# Altium PCB PCB.PcbDoc
Units mm, origin at the board's own origin, x right, y up, seen from the top; angles counter-clockwise.
Board outline 150.33 x 100.29 mm, 2 copper layers (Top Layer, Bottom Layer); 62 components, 51 nets, 221 pads, 24 vias.
Unrouted connection lines stored in the file: 2.
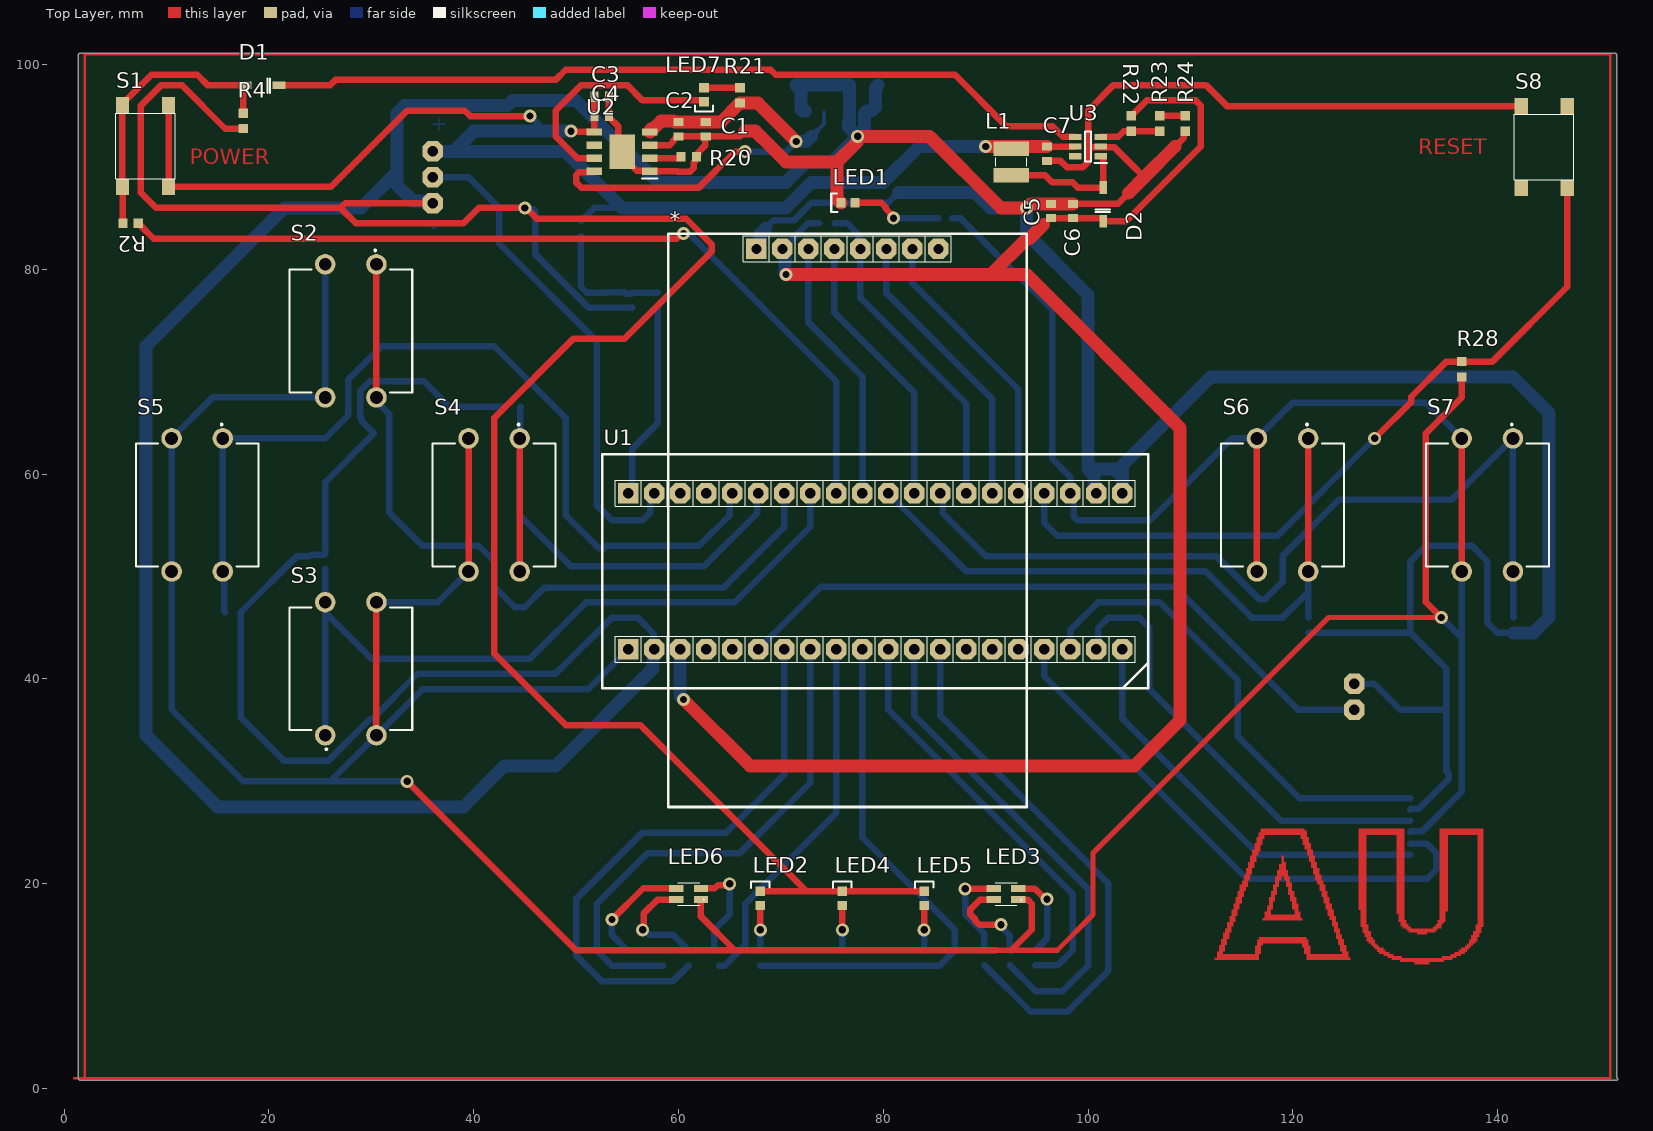
[diagram p0: Top Layer view]
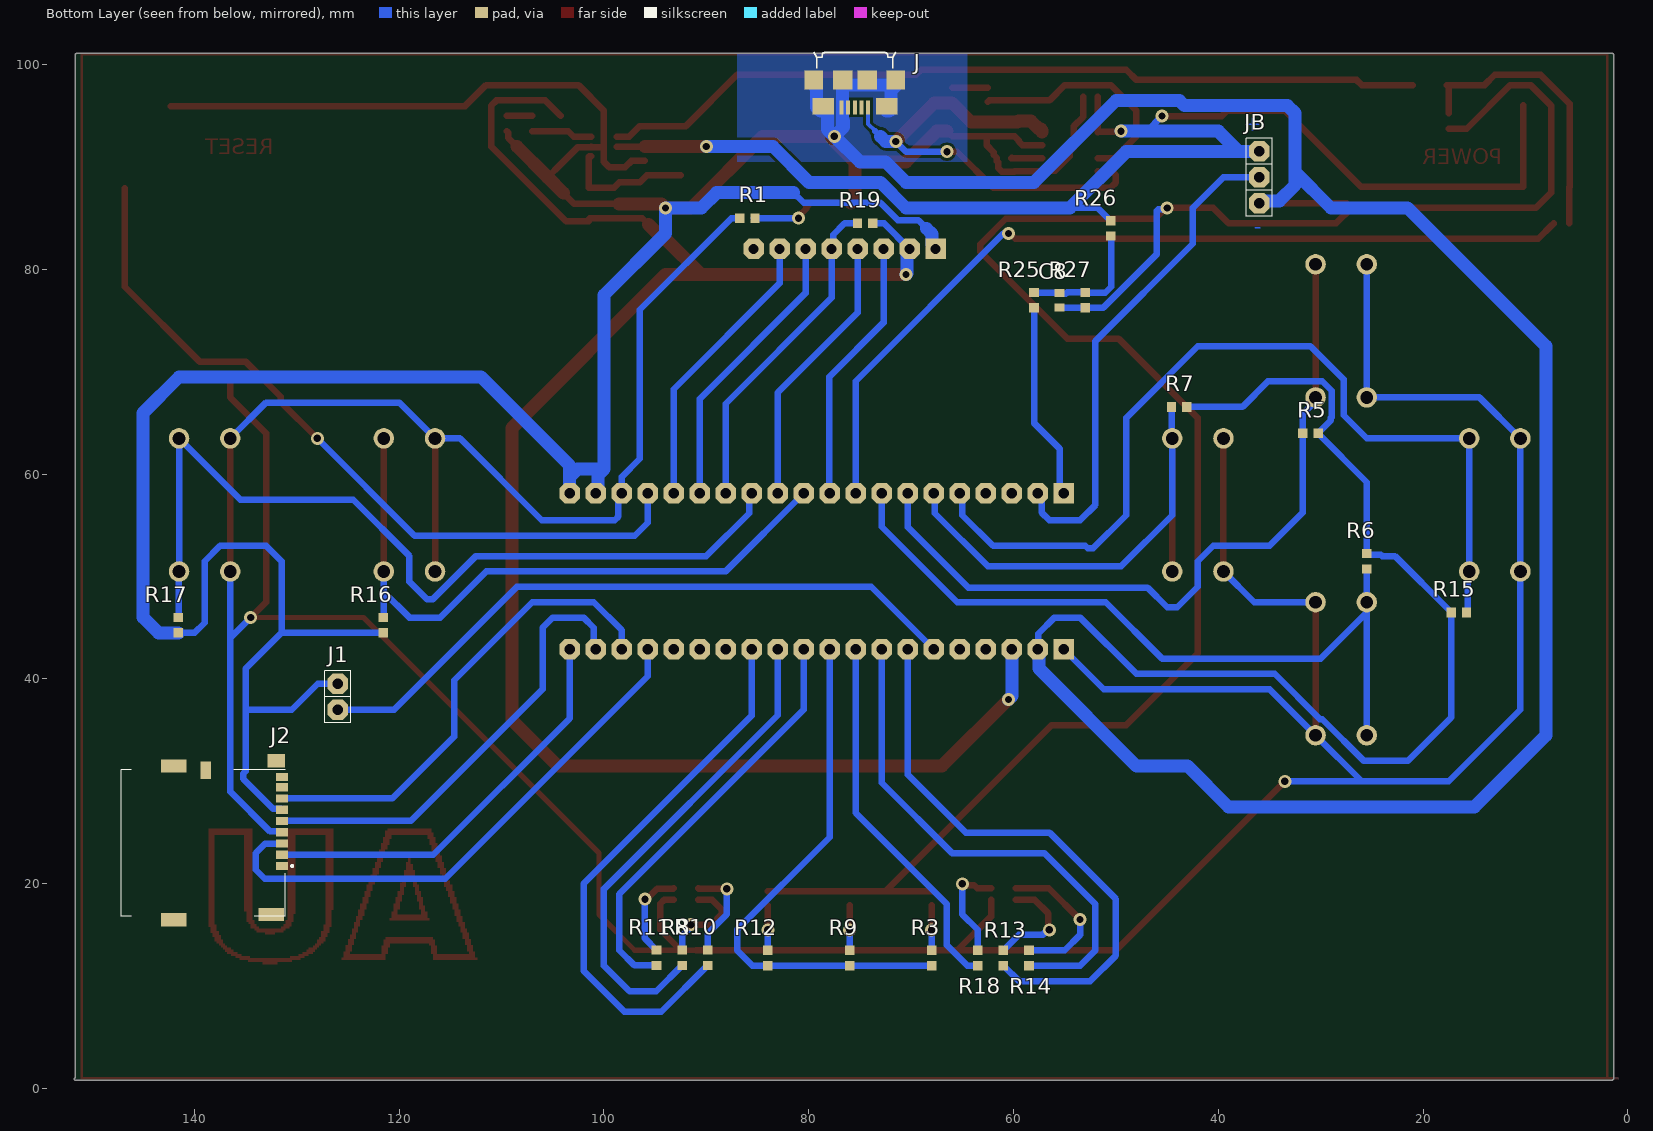
[diagram p1: Bottom Layer view, seen from below]
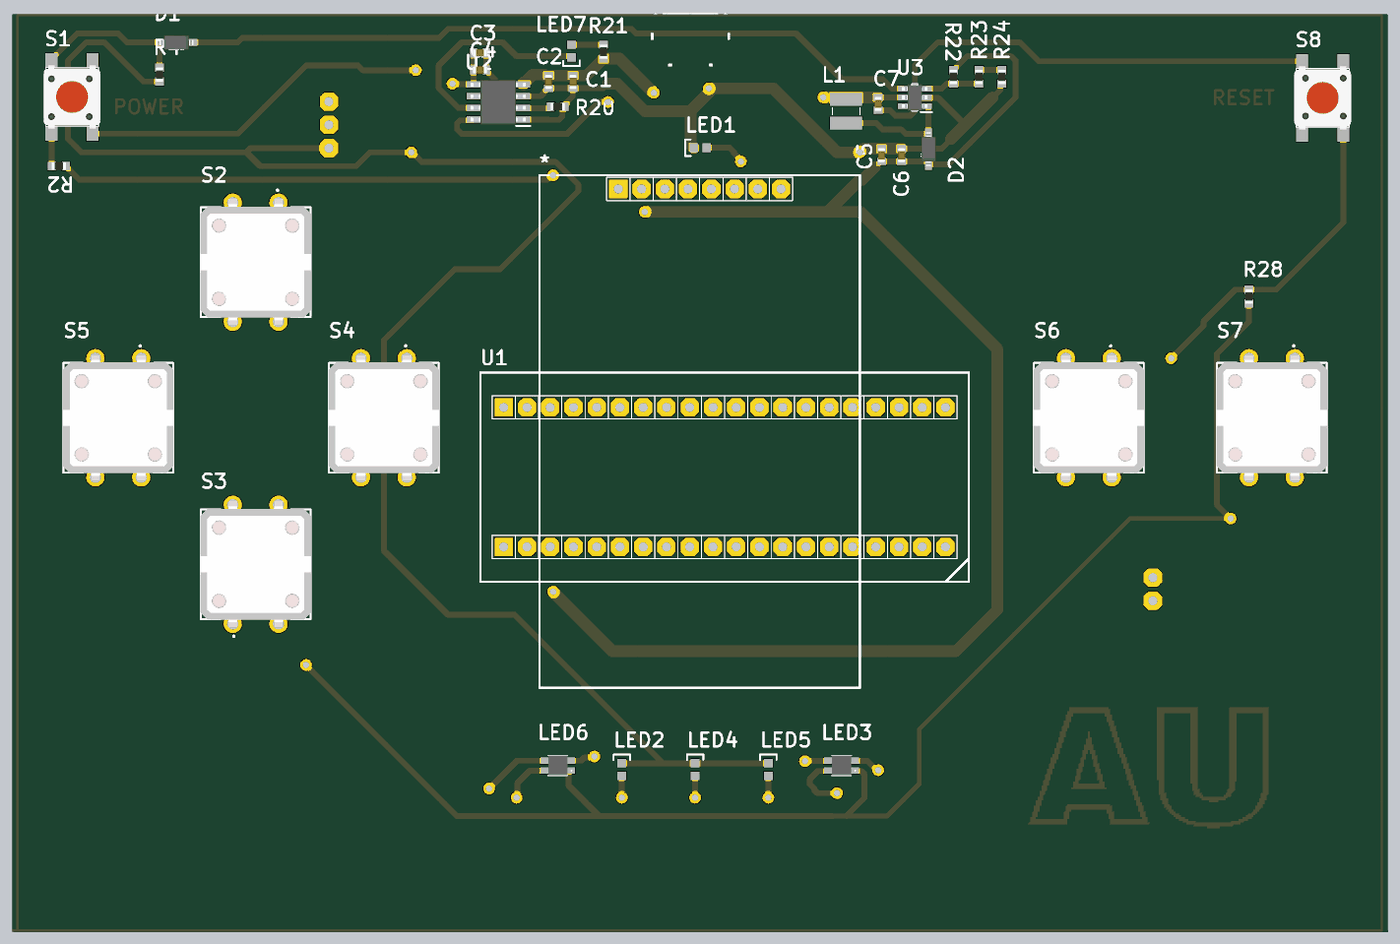
[diagram p2: 3D render of the assembled board from above, using the file's embedded part models]
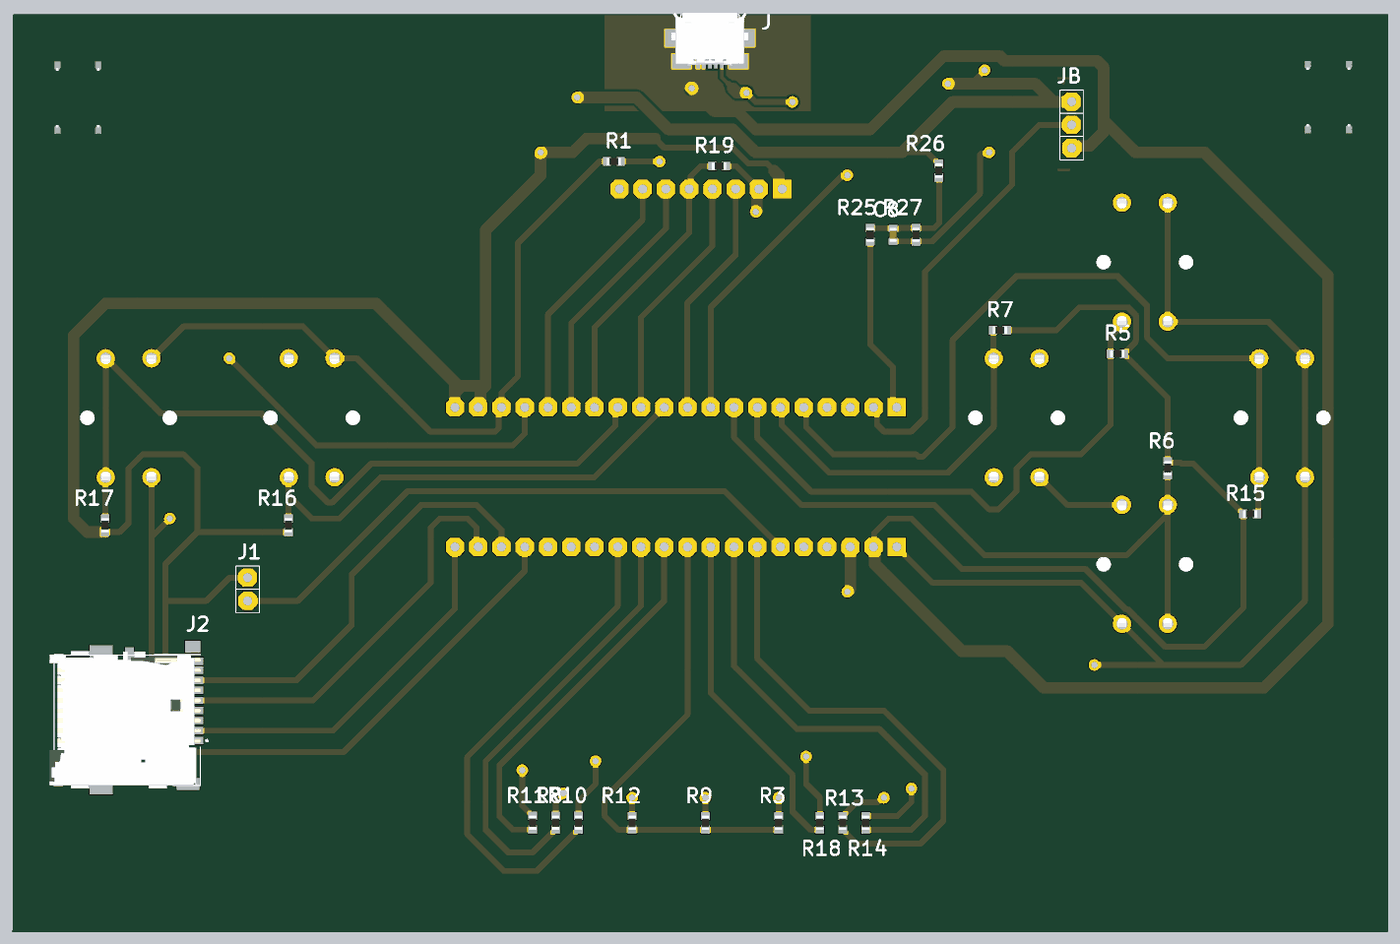
[diagram p3: 3D render of the assembled board from below, using the file's embedded part models]

## Layer stack, top to bottom
Top Solder: solder mask 0.0102, Solder Resist, Dk 3.5
Top Layer: signal copper 0.0356
Dielectric 1: dielectric 0.32, FR-4, Dk 4.8
Bottom Layer: signal copper 0.0356
Bottom Solder: solder mask 0.0102, Solder Resist, Dk 3.5

## Board outline
1.397,0.965 ccw(c1.524,0.965) 1.508,0.839 ccw(c1.599,0.928) 1.599,0.801 151.599,0.801 ccw(c151.599,0.928) 151.726,0.928 ccw(c151.599,0.928) 151.651,1.044 151.651,100.965 ccw(c151.524,100.965) 151.524,101.092 1.524,101.092 ccw(c1.524,100.965) 1.397,100.965

## Design rules (kind name [scope] priority, off if disabled: settings)
Clearance [All] p1: gap=0.254 ignorepadtopadclearanceinfootprint=FALSE except(0: Arc-Hole Track-Hole SMDPad-Hole THPad-Hole Via-Hole Fill-Hole Poly-Hole Region-Hole Text-Hole)
PolygonConnect [All] p1: connectstyle=Relief reliefconductorwidth=0.254 reliefentries=4 polygonreliefangle="90 Angle" airgapwidth=0.254
RoutingVias [All] p1: holewidth=0.711 width=1.27 viastyle="Through Hole" minholewidth=0.711 minwidth=1.27 maxholewidth=0.711 maxwidth=1.27
SolderMaskExpansion [All] p1: expansion=0.102 istentingtop=FALSE
Width [All] p1: maxlimit=2.54 minlimit=0.406 preferedwidth=0.508
30 further rules are at their usual default settings.

## Components (designator, comment, footprint, x,y, rotation, side; value= is the part's Value field where it differs from the comment)
* "1.8_ST7735_TFT" 1.8_ST7735_TFT 77.5,55 r0 top
C1 "4.7uF" "0603 Capacitor" 62.671,93.7 r270 top
C2 "4.7uF" "0603 Capacitor" 60,93.7 r270 top
C3 "4.7uF" "0603 Capacitor" 52.5,96.865 r180 top
C4 "4.7uF" "0603 Capacitor" 52.5,95 r180 top
C5 "4.7uF" "0603 Capacitor" 96.374,85.7 r270 top
C6 "4.7uF" "0603 Capacitor" 98.55,85.7 r270 top
C7 "4.7uF" "0603 Capacitor" 96,91.3 r90 top
C8 "4.7uF" "0603 Capacitor" 55.5,77 r90 bottom
D1 "SOD-123 Diode" SOD123 19.35,98 r180 top
D2 "SOD-123 Diode" SOD123 101.5,86.35 r90 top
J "MicroUSB" MicroUSB 75.5,98.5 r0 bottom
J1 "JumperHDR_ALT" JumperHDR 126,37 r90 bottom
J2 "TF_SD" TF_SD 139,24 r90 bottom
JB "JumperHDR3" JumperHDR3 36,91.54 r270 bottom
L1 "INDUCTOR_3x3.5" INDUCTOR_3x3.5 92.5,90.5 r90 top
LED1 "0603 LED" "0603 LED" 76.5,86.5 r0 top
LED2 "0603 LED" "0603 LED" 68,18.635 r270 top
LED3 "2020 RGB LED" "20x20 RGB LED" 92,19 r0 top
LED4 "0603 LED" "0603 LED" 76,18.635 r270 top
LED5 "0603 LED" "0603 LED" 84,18.635 r270 top
LED6 "2020 RGB LED" "20x20 RGB LED" 61,19 r0 top
LED7 "0603 LED" "0603 LED" 62.5,97 r90 top
R1 "4.7K" "0603 Resistor" 86,85 r0 bottom
R2 "4.7K" "0603 Resistor" 6.5,84.5 r180 top
R3 "4.7K" "0603 Resistor" 68,12.75 r270 bottom
R4 "4.7K" "0603 Resistor" 17.5,94.5 r90 top
R5 "4.7K" "0603 Resistor" 31,64 r0 bottom
R6 "4.7K" "0603 Resistor" 25.5,51.5 r270 bottom
R7 "4.7K" "0603 Resistor" 43.831,66.572 r0 bottom
R8 "4.7K" "0603 Resistor" 92.362,12.768 r90 bottom
R9 "4.7K" "0603 Resistor" 76,12.75 r270 bottom
R10 "4.7K" "0603 Resistor" 89.862,12.768 r90 bottom
R11 "4.7K" "0603 Resistor" 94.862,12.768 r90 bottom
R12 "4.7K" "0603 Resistor" 84,12.75 r270 bottom
R13 "4.7K" "0603 Resistor" 61,12.75 r90 bottom
R14 "4.7K" "0603 Resistor" 58.5,12.75 r90 bottom
R15 "4.7K" "0603 Resistor" 16.5,46.5 r180 bottom
R16 "4.7K" "0603 Resistor" 121.545,45.261 r90 bottom
R17 "4.7K" "0603 Resistor" 141.568,45.261 r90 bottom
R18 "4.7K" "0603 Resistor" 63.5,12.75 r90 bottom
R19 "10K" "0603 Resistor" 74.5,84.5 r180 bottom
R20 "1.2K" "0603 Resistor" 61,91 r180 top
R21 "1K" "0603 Resistor" 66,97 r90 top
R22 "4,7k" "0603 Resistor" 104.213,94.25 r90 top
R23 "470R" "0603 Resistor" 107,94.25 r270 top
R24 "200R" "0603 Resistor" 109.5,94.25 r90 top
R25 "1K" "0603 Resistor" 58,77 r270 bottom
R26 "1M" "0603 Resistor" 50.5,84 r90 bottom
R27 "1M" "0603 Resistor" 53,77 r90 bottom
R28 "4.7K" "0603 Resistor" 136.5,70.25 r90 top
S1 "GUC" "TACT SWITCH SMD" 8,92 r90 top
S2 "YUKARI" "12x12 Tact Switch" 28,74 r90 top
S3 "ASAGI" "12x12 Tact Switch" 28,41 r270 top
S4 "SAG" "12x12 Tact Switch" 42,57 r90 top
S5 "SOL" "12x12 Tact Switch" 13,57 r90 top
S6 "A" "12x12 Tact Switch" 119,57 r90 top
S7 "B" "12x12 Tact Switch" 139,57 r90 top
S8 "RESET" "TACT SWITCH SMD" 144.5,92 r270 top
U1 "STM32F103_BLUE" STM32_BLUE_PILL 81,49.5 r180 top
U2 "TP4056" TP4056A 54.5,91.5 r180 top
U3 "MT3608" MT3608 100,92 r180 top

## Footprints (in the part's own frame and the unit in brackets; to place one, negate y for a bottom-side part, rotate by r counter-clockwise, add the part's x,y. Pads: shape width x height; smd on the part's side, far side on the other; paste and mask are expansions set on the pad)
1.8_ST7735_TFT [mm]
  rect 2x2 hole 1: 1(-9.89,27)
  oct 2x2 hole 1: 2(-7.35,27) 3(-4.81,27) 4(-2.27,27) 5(0.27,27) 6(2.81,27) 7(5.35,27) 8(7.89,27)
  silkscreen extent -18.5,-27.5 16.5,28.5
"12x12 Tact Switch" [mm]
  round 2 hole 1.25: 1(-6.5,-2.5) 1(6.5,-2.5) 2(-6.5,2.5) 2(6.5,2.5)
  silkscreen extent -6,-6 7.94,6, body extent -6.9,-6.05 6.9,6.05, height 7.3
"20x20 RGB LED" [mm]
  rect 1.4x0.7 smd: 1(1.2,-0.55) 2(-1.2,-0.55) 3(-1.2,0.55) 4(1.2,0.55)
  silkscreen extent -1.08,-1.08 1.54,1.08, body extent -1.05,-1.05 1.05,1.05, height 1.2
"0603 Capacitor" [mm]
  rect 0.78x0.99 smd: 1(-0.7,0) 2(0.7,0)
  body extent -0.8,-0.41 0.8,0.41, height 0.9
"0603 LED" [mm]
  rect 0.9x0.95 smd: 1(-0.635,0) 2(0.75,0)
  silkscreen extent -1.58,-0.9 -0.97,0.9
"0603 Resistor" [mm]
  rect 0.9x0.95 smd: 1(-0.75,0) 2(0.75,0)
  body extent -0.77,-0.4 0.77,0.4, height 0.55
INDUCTOR_3x3.5 [mm]
  rect 1.4x3.5 smd: 1(-1.3,0) 2(1.3,0)
  silkscreen extent -0.4,-1.5 0.4,1.5
JumperHDR [mm]
  oct 2x2 hole 1: 1(0,0) 2(2.54,0)
  silkscreen extent -1.27,-1.27 3.81,1.27
JumperHDR3 [mm]
  oct 2x2 hole 1: 1(0,0) 2(2.54,0) 3(5.08,0)
  silkscreen extent -1.27,-1.27 6.35,1.27
MicroUSB [mm]
  rect 0.4x1.35 smd: 1(-1.3,2.675) 2(-0.65,2.675) 3(0,2.675) 4(0.65,2.675) 5(1.3,2.675)
  rect 1.8x1.9 smd: 5(-4,0) 5(4,0)
  rect 2.1x1.6 smd: 5(-3.1,2.55) 5(3.1,2.55)
  rect 1.9x1.9 smd: 5(-1.2,0) 5(1.2,0)
  silkscreen extent -4,-2.7 4,-1.13, body extent -4.32,-2.8 4.33,3.1, height 2.76
MT3608 [mm]
  rect 1.2x0.6 smd: 1(-1.25,0.95) 2(-1.25,0) 3(-1.25,-0.95) 4(1.25,-0.95) 5(1.25,0) 6(1.25,0.95)
  silkscreen extent -1.85,-1.45 0.3,1.6, body extent -1.4,-1.45 1.4,1.45, height 1.45
SOD123 [mm]
  rect 1.25x0.75 smd: 1(-1.65,0) 2(1.65,0)
  silkscreen extent -0.76,-0.64 -0.51,0.76, body extent -1.85,-0.77 1.85,0.77, height 1.35
STM32_BLUE_PILL [mm]
  oct 2x2 hole 1: 1(-22.352,6.604) 2(-19.812,6.604) 3(-17.272,6.604) 4(-14.732,6.604) 5(-12.192,6.604) 6(-9.652,6.604) 7(-7.112,6.604) 8(-4.572,6.604) 9(-2.032,6.604) 10(0.508,6.604) 11(3.048,6.604) 12(5.588,6.604) 13(8.128,6.604) 14(10.668,6.604) 15(13.208,6.604) 16(15.748,6.604) 17(18.288,6.604) 18(20.828,6.604) 19(23.368,6.604) 21(-22.352,-8.636) 22(-19.812,-8.636) 23(-17.272,-8.636) 24(-14.732,-8.636) 25(-12.192,-8.636) 26(-9.652,-8.636) 27(-7.112,-8.636) 28(-4.572,-8.636) 29(-2.032,-8.636) 30(0.508,-8.636) 31(3.048,-8.636) 32(5.588,-8.636) 33(8.128,-8.636) 34(10.668,-8.636) 35(13.208,-8.636) 36(15.748,-8.636) 37(18.288,-8.636) 38(20.828,-8.636) 39(23.368,-8.636)
  rect 2x2 hole 1: 20(25.908,6.604) 40(25.908,-8.636)
  silkscreen extent -24.89,-12.45 28.45,10.41
"TACT SWITCH SMD" [mm]
  rect 1.55x1.3 smd: 1(-3.95,2.3) 1(4.05,2.3) 2(-3.95,-2.2) 2(4.05,-2.2)
  silkscreen extent -3.15,-2.85 3.25,2.95, body extent -3.9,-3.05 4,3.15, height 7
TF_SD [mm]
  rect 0.8x1.2 smd: 1(-2.27,-7.55) 2(-1.17,-7.55) 3(-0.07,-7.55) 4(1.03,-7.55) 5(2.13,-7.55) 6(3.23,-7.55) 7(4.33,-7.55) 8(5.43,-7.55) 9(6.43,-7.55)
  rect 1.3x2.5 smd: 10(-7,-6.5) 11(-7.5,3) 12(7.5,3)
  rect 1.3x1.7 smd: 13(8,-7)
  rect 1.7x1 smd: CD1(7.08,-0.1)
  silkscreen extent -7.15,-8.65 7.15,8.15, body extent -7.5,-7.88 7.5,8.62, height 1.65
TP4056A [mm]
  rect 1.525x0.7 smd: 1(-2.712,1.905) 2(-2.712,0.635) 3(-2.712,-0.635) 4(-2.712,-1.905) 5(2.712,-1.905) 6(2.712,-0.635) 7(2.712,0.635) 8(2.712,1.905)
  rect 2.513x3.402 smd: 3(0,0)
  silkscreen extent -3.47,2.6 -1.95,2.6, body extent -3,-2.45 3,2.45, height 1.75

## Part data
C1 C2 C3 C4 C5 C6 C7 C8: library part "0603 Capacitor", "Capacitor", Arrow Part Number=06031A120JAT2A, Manufacturer_Name=AVX, Mouser Part Number=581-06031A120J, Arrow Price/Stock=https://www.arrow.com/en/products/06031a120jat2a/avx, Datasheet Link=http://www.mouser.com/catalog/supplier/library/pdf/AVXSurfaceMountCeramic.pdf, Height=0.9mm, Manufacturer_Part_Number=06031A120JAT2A, Mouser Price/Stock=https://www.mouser.co.uk/ProductDetail/AVX/06031A120JAT2A?qs=tMrmimOZp5UsY%252BxF6dNGxQ%3D%3D
D1 D2: "Diode", Arrow Part Number=1N4148W-G3-08, Manufacturer_Name=Vishay, Mouser Part Number=78-1N4148W-G3-08, Arrow Price/Stock=https://www.arrow.com/en/products/1n4148w-g3-08/vishay, Datasheet Link=https://componentsearchengine.com/Datasheets/1/1N4148W-G3-08.pdf, Height=1.35mm, Manufacturer_Part_Number=1N4148W-G3-08, Mouser Price/Stock=https://www.mouser.co.uk/ProductDetail/Vishay-Semiconductors/1N4148W-G3-08?qs=uS%252BVSIFnvp46StDBB15x4Q%3D%3D
J: Package=None, Availability=Unavailable, MF=Hirose, MP=ZX62-B-5PA, Price=None, SnapEDA_Link=https://www.snapeda.com/parts/ZX62-B-5PA/Hirose%20Electric%20Co%20Ltd/view-part/134668/?ref=snap
J2: "Connector", Arrow Part Number=045138008100858+, Manufacturer_Name=AVX, Mouser Part Number=581-045138008100858+, Arrow Price/Stock=https://www.arrow.com/en/products/045138008100858/avx, Datasheet Link=https://www.mouser.sg/datasheet/2/909/5138-1359342.pdf, Height=1.4mm, Manufacturer_Part_Number=045138008100858+, Mouser Price/Stock=https://www.mouser.com/Search/Refine.aspx?Keyword=581-045138008100858%2B
L1: "Inductor", Manufacturer_Name="Shuo Xing", Manufacturer_Part_Number=CD32-4R7M, Datasheet Link=http://aitendo3.sakura.ne.jp/aitendo_data/product_img/parts/coil/CD32/CD32.pdf, Height=2.4mm
LED1 LED2 LED4 LED5 LED7: "LED", Manufacturer_Name="Wurth Elektronik", Manufacturer_Part_Number=150060GS55040, Mouser Part Number=710-150060GS55040, Datasheet Link=https://katalog.we-online.de/led/datasheet/150060GS55040.pdf, Height=0.5mm, Mouser Price/Stock=https://www.mouser.com/Search/Refine.aspx?Keyword=710-150060GS55040
LED3 LED6: "LED", Manufacturer_Name="Foshan NationStar Optoelectronics", Manufacturer_Part_Number=FM-B2020RGBA-HG, Datasheet Link=https://datasheet.lcsc.com/szlcsc/Foshan-NationStar-Optoelectronics-FM-B2020RGBA-HG_C108793.pdf, Height=1.1mm
R1 R2 R3 R4 R5 R6 R7 R8 R9 R10 R11 R12 R13 R14 R15 R16 R17 R18 R19 R20 R21 R22 R23 R24 R25 R26 R27 R28: library part "0603 Resistor", "Resistor", Arrow Part Number=CPF0603B100RE1, Manufacturer_Name="TE Connectivity", Mouser Part Number=279-CPF0603B100RE1, Arrow Price/Stock=https://www.arrow.com/en/products/cpf0603b100re1/te-connectivity, Datasheet Link=http://www.farnell.com/datasheets/1786775.pdf, Height=0.55mm, Manufacturer_Part_Number=CPF0603B100RE1, Mouser Price/Stock=https://www.mouser.co.uk/ProductDetail/TE-Connectivity-Neohm/CPF0603B100RE1?qs=DfH2yQaBz6s2KWheq2AlNw%3D%3D
S1 S8: library part "TACT SWITCH SMD", Package=None, Availability=Unavailable, MF=Omron, MP=B3F-1000, Price=None, SnapEDA_Link=https://www.snapeda.com/parts/B3F-1000/Omron%20Electronics%20Inc-EMC%20Div/view-part/48569/?ref=snap
S2 S3 S4 S5 S6 S7: library part TACTSWITCH_12x12, "Switch", Arrow Part Number=B3F-4005, Manufacturer_Name="Omron Electronics", Mouser Part Number=653-B3F-4005, Arrow Price/Stock=https://www.arrow.com/en/products/b3f4005/omron?region=nac, Datasheet Link=http://omronfs.omron.com/en_US/ecb/products/pdf/en-b3f.pdf, Manufacturer_Part_Number=B3F-4005, Mouser Price/Stock=https://www.mouser.co.uk/ProductDetail/Omron-Electronics/B3F-4005?qs=B3tblJ0Nlt%2F4UotbOU6yJQ%3D%3D
U2: "Connector", Manufacturer_Name="NanJing Top Power", Datasheet Link=https://dlnmh9ip6v2uc.cloudfront.net/datasheets/Prototyping/TP4056.pdf, Height=1.75mm, Manufacturer_Part_Number=TP4056
U3: "Undefined or Miscellaneous", Manufacturer_Name=Aerosemi, Datasheet Link=https://www.olimex.com/Products/Breadboarding/BB-PWR-3608/resources/MT3608.pdf, Height=1.45mm, Manufacturer_Part_Number=MT3608

## Via types
v1: diameter 1.27, hole 0.711, Top Layer to Bottom Layer, 24 vias

## Nets (pads, with @x,y where several pads share a name; then routed paths per layer and width w, separated by ;. In a path a pad name is that pad's centre, name@x,y a point inside that pad or via, vN(x,y) a via of type N, cw(c..) or ccw(c..) an arc to the next point about the centre after c; other vN are vias at no path point)
3V3: J2.4 LED3.1 LED6.1 R1.2 R28.1 S2.2 S3.2 S4.2 S5.2 S6.2 S7.2 U1.20 U1.23 | length 452.1
  Top Layer w0.508: 91,13.5 92.5,13.5 97,13.5 100.5,17 100.5,23 123.5,46 v1(134.5,46)
  Top Layer w0.635: S3.2@30.5,34.5 S3.2@30.5,47.5 ; v1(33.5,30) 50,13.5 65.5,13.5 ; S4.2@39.5,50.5 S4.2@39.5,63.5 ; LED6.1 62.2,16.8 65.5,13.5 ; 91,13.5 88.5,13.5 65.5,13.5 ; 92.5,13.5 94.5,15.5 94.5,18.046 94.128,18.417 93.233,18.417 LED3.1 ; S6.2@116.5,50.5 S6.2@116.5,63.5 ; v1(134.5,46) 133,47.5 133,64 136.5,67.5 R28.1 ; S7.2@136.5,50.5 S7.2@136.5,63.5
  Bottom Layer w0.635: S2.2@25.5,80.5 25.5,67.5 14.5,67.5 10.5,63.5 10.5,50.5 10.5,37 17.5,30 26,30 ; S3.2@30.5,47.5 36.5,47.5 S4.2@39.5,50.5 ; v1(33.5,30) 26,30 ; U1.20 51.196,39 35,39 30.5,34.5 26,30 ; R1.2 87.552,85 96.5,76.052 96.5,61.5 98.272,59.728 U1.23 98.585,57.823 98.585,55.872 98.957,55.5 106.07,55.5 114.07,63.5 116.5,63.5 120,67 133,67 S7.2@136.5,63.5 ; J2.4 131.533,25.113 132.613,25.113 136.5,29 136.5,44 ; v1(134.5,46) 136.5,44 ; S7.2@136.5,50.5 136.5,44
5V: *.2 C5.2 C6.2 D2.1 R19.2 R22.2 U1.18 | length 176.2
  Top Layer w0.635: 95.635,84.365 96.269,85 C5.2 C6.2 101.379,85 101.5,84.879 D2.1 103.7,84.7 111,92 111,96 110.5,96.5 105.738,96.5 104.238,95 R22.2
  Top Layer w1.27: v1(60.5,38) 67,31.5 104.5,31.5 109,36 109,64.5 94,79.5 90.5,79.5 ; v1(70.5,79.5) 90.5,79.5 ; 95.635,84.365 94.269,83 94,83 90.5,79.5
  Bottom Layer w0.635: *.2 72.65,84.5 R19.2
  Bottom Layer w1.27: U1.18 60.172,38.328 v1(60.5,38) ; *.2 70.387,81.763 70.387,79.613 v1(70.5,79.5)
5VUSB: C1.1 C2.1 J.1 R21.1 U2.4 U2.8 | length 47.9
  Top Layer w0.635: U2.8 51.693,89.5 50.298,89.5 50,89.202 50,88.5 50.5,88 62,88 65.5,91.5 v1(66.5,91.5)
  Top Layer w1.27: U2.4 57.212,93.562 57.34,93.69 57.497,93.69 58.307,94.5 59.5,94.5 59.6,94.4 C2.1 C1.1 64.15,94.4 R21.1 67.75,96.25 v1(71.5,92.5)
  Bottom Layer w0.406: 73.5,93.5 74.2,94.2 J.1@74.2,95.325
  Bottom Layer w0.635: v1(66.5,91.5) 70.5,91.5 v1(71.5,92.5) ; 73,93 73.5,93.5
  Bottom Layer w1.27: v1(71.5,92.5) 72.5,92.5 73,93
GND: *.1 C1.2 C2.2 C3.1 C4.1 C5.1 C6.1 C7.1 C8.1 J1.2 J2.6 J.4 J.5 JB.3 LED1.1 LED2.1 LED4.1 LED5.1 R4.1 R5.1 R6.1 R7.1 R15.1 R16.1 R17.1 R20.1 R24.1 R27.1 S8.2 U1.19 U1.21 U1.22 U2.1 U2.3 U3.2 | length 878.1
  Top Layer w0.635: R4.1 15.75,93.75 11.5,98 9.5,98 7.5,96 7.5,87.5 9,86 27,86 ; JB.3 27.46,86.46 27,86 ; C3.1 C4.1 53.2,94.895 54.095,94 54.128,94 54.128,91.872 54.5,91.5 54.5,91.055 55.928,89.627 57.18,89.627 U2.1 59.905,89.595 59.951,89.549 61.137,89.549 61.509,89.921 61.509,90.471 61.618,90.579 61.618,90.867 R20.1 61.946,91.196 61.946,91.455 62.636,92.146 62.636,92.965 C1.2 ; U2.3@57.212,92.135 59.135,92.135 59.496,92.496 59.496,92.601 59.895,93 C2.2 C1.2 ; 66.5,93.5 66,93 C1.2 ; LED2.1 72.5,19.27 ; LED5.1 LED4.1 72.5,19.27 ; C7.1 97.32,90.6 97.921,90 99.5,90 100,90.5 100,91.702 ; C6.1 102.9,86.4 103.95,87.45 ; 105.5,89 104.205,90.295 102.546,91.954 101.296,91.954 U3.2 101.204,91.954 100.252,91.954 100,91.702 ; 108.5,92 109.343,92.843 109.343,93.367 109.475,93.5 R24.1 ; S8.2@142.3,95.95 113.566,95.95 111.516,98 102.5,98 100,95.5 100,91.702 ; 27,86 28.5,84.5 39,84.5 40.5,86 v1(45,86) 45.123,86 46.184,84.939 60.767,84.939 63.237,82.469 63.237,81.737 54.75,73.25 49.75,73.25 42,65.5 42,42.5 49,35.5 56.27,35.5 72.5,19.27
  Top Layer w1.27: 66.5,93.5 67.5,93.5 69,92 70.5,90.5 75.5,90.5 ; LED1.1 75.5,86.865 75.5,90.5 ; C6.1 C5.1 94.4,86.4 v1(94,86) 91.5,86 84.5,93 v1(77.5,93) 77.5,92.5 75.5,90.5 ; 103.95,87.45 105.5,89 108.5,92
  Bottom Layer w0.635: R7.1 37.649,66.572 35.149,69.071 29.849,69.071 28.929,68.151 28.929,65.571 29,65.5 29,65.275 30.25,64.025 R5.1 30.25,63.975 25.5,59.225 R6.1 25.368,52.117 24.117,52.117 24,52 22.75,52 17.408,46.657 17.383,46.657 17.25,46.525 R15.1 17.25,36.25 21.5,32 25.778,32 29.849,36.072 30.072,36.072 34.5,40.5 48,40.5 53.5,46 56,46 57.579,44.421 57.579,42.948 U1.19 ; v1(45,86) 45.121,85.878 45.852,85.878 46,85.73 46,81.5 51.225,76.275 55.475,76.275 C8.1 ; 68.5,84 69.294,84.794 71.294,84.794 73,86.5 80.5,86.5 81.5,87.5 ; R16.1 131.489,44.511 ; J1.2 127.96,39.54 130.5,37 135,37 ; J2.6 131.533,27.313 132.313,27.313 135.237,30.237 135.237,30.763 135,31 135,37 ; R17.1 139.989,44.511 139,45.5 139,51.5 137.5,53 133,53 131.489,51.489 131.489,44.511 ; 131.489,44.511 135,41 135,37
  Bottom Layer w1.27: JB.3 35.763,86.697 34.047,86.697 32.5,88.244 32.5,89.5 ; U1.19 57.5,42.764 57.5,41 48,31.5 43,31.5 39,27.5 15,27.5 8,34.5 8,72.5 21.5,86 29,86 32.5,89.5 ; *.1 67.975,82.365 67.975,83.475 68.5,84 ; J.5@72.4,95.45 72.15,95.45 71.985,95.615 71.985,97.465 71.5,97.95 71.5,98 74.3,98 76.7,98 76.7,94.022 76.589,93.911 ; 76.589,94.5 76.589,93.911 ; J.5@79.5,98 79.235,97.735 79.235,95.835 78.85,95.45 78.6,95.45 78.35,95.45 78.185,95.285 78.185,93.685 v1(77.5,93) ; 81.5,87.5 89,87.5 90.5,86 v1(94,86) 94,83.5 100,77.5 100,60.5 ; U1.22 100.575,58.373 100.575,59.925 100,60.5 ; 103.115,59.993 102.608,60.5 100,60.5 ; U1.21 103.352,60.852 112,69.5 141.5,69.5 145,66 145,46 143.511,44.511 R17.1 ; 32.5,89.5 32.5,95.256 33.244,96 43.304,96 43.804,96.5 50,96.5 58,88.5 70.5,88.5 72.5,90.5 75,90.5 v1(77.5,93) ; 76.589,93.911 v1(77.5,93)
NetC8_2: C8.2 R25.1 R26.1 R27.2 | length 12.9
  Bottom Layer w0.635: R26.1 50.46,83.21 50.46,78.297 51.032,77.725 52.975,77.725 R27.2 54.75,77.75 54.887,77.613 54.901,77.628 55.427,77.628 C8.2 55.525,77.725 57.975,77.725 R25.1
NetD1_2: D1.2 R2.2 R4.2 S1.1 | length 28.1
  Top Layer w0.635: R2.2 5.725,84.525 5.725,88.025 5.7,88.05 5.7,96.05 5.7,96.175 8.525,99 13,99 14,98 D1.2 ; R4.2 17.5,97.879 D1.2@17.621,98
NetD2_2: D2.2 L1.1 U3.1 | length 12.8
  Top Layer w0.635: L1.1 95.8,89.2 96.5,88.5 98.5,88.5 99,88 D2.2 101.5,91.004 101.454,91.05 U3.1
NetLED1_2: LED1.2 R1.1 | length 8.9
  Top Layer w0.635: LED1.2 79.806,86.5 80.255,86.051 80.255,85.917 81,85.172 v1(81,85)
  Bottom Layer w0.635: v1(81,85) R1.1@85.383,85
NetLED2_2: LED2.2 R3.1 | length 4.4
  Top Layer w0.635: v1(68,15.5) LED2.2
  Bottom Layer w0.635: R3.1 v1(68,15.5)
NetLED3_2: LED3.2 R8.2 | length 9.5
  Top Layer w0.635: LED3.2 90.768,18.417 89.417,18.417 88.513,17.513 88.513,16.987 89,16.5 89,16.372 89.372,16 v1(91.5,16)
  Bottom Layer w0.635: v1(91.5,16) 91.5,15.828 92.362,14.966 R8.2
NetLED3_3: LED3.3 R10.2 | length 9.6
  Top Layer w0.635: v1(88,19.5) 89.587,19.5 89.605,19.518 90.768,19.518 LED3.3
  Bottom Layer w0.635: v1(88,19.5) 88,17 89.862,15.138 R10.2
NetLED3_4: LED3.4 R11.2 | length 8.7
  Top Layer w0.635: LED3.4 93.233,19.518 94.811,19.518 95.828,18.5 v1(96,18.5)
  Bottom Layer w0.635: R11.2 96,14.657 v1(96,18.5)
NetLED4_2: LED4.2 R9.1 | length 4.4
  Top Layer w0.635: v1(76,15.5) LED4.2
  Bottom Layer w0.635: R9.1 v1(76,15.5)
NetLED5_2: LED5.2 R12.1 | length 4.4
  Top Layer w0.635: v1(84,15.5) LED5.2
  Bottom Layer w0.635: R12.1 v1(84,15.5)
NetLED6_2: LED6.2 R13.2 | length 10.7
  Top Layer w0.635: v1(56.5,15.5) 56.587,15.587 56.587,17.087 57.95,18.45 LED6.2
  Bottom Layer w0.635: v1(56.5,15.5) 56.672,15.5 57.172,15 59.5,15 60.842,13.657 60.842,13.633 60.975,13.5 R13.2
NetLED6_3: LED6.3 R14.2 | length 14.7
  Top Layer w0.635: v1(53.5,16.5) 56.55,19.55 LED6.3
  Bottom Layer w0.635: v1(53.5,16.5) 53.5,15 55,13.5 R14.2
NetLED6_4: LED6.4 R18.2 | length 10.1
  Top Layer w0.635: LED6.4 63.55,19.55 63.879,19.878 64.878,19.878 v1(65,20)
  Bottom Layer w0.635: R18.2 63.5,15.5 65,17 v1(65,20)
NetLED7_1: LED7.1 U2.7 | length 23.4
  Top Layer w0.635: U2.7 50.135,90.865 48,93 48,95.5 50.5,98 55,98 56.5,96.5 62.365,96.5 LED7.1
NetLED7_2: LED7.2 R21.2 | length 3.5
  Top Layer w0.635: LED7.2 R21.2
NetR20_2: R20.2 U2.2 | length 3.1
  Top Layer w0.635: U2.2 57.241,90.836 60.221,90.836 R20.2@60.153,90.903
NetR22_1: R22.1 R23.2 U3.3 | length 6
  Top Layer w0.635: U3.3 102.95,92.95 103.5,93.5 R22.1 R23.2 R23.2@106.975,93.5
NetR23_1: R23.1 R24.2 | length 2.5
  Top Layer w0.635: R23.1 R24.2
NetR25_2: R25.2 U1.40 | length 19.3
  Bottom Layer w0.635: U1.40 55.5,58.544 55.5,62.5 58,65 R25.2
nRST: R28.2 S8.1 U1.24 | length 74.5
  Top Layer w0.635: v1(128,63.5) 131.561,67.061 131.561,67.561 135,71 R28.2 139.5,71 146.8,78.3 S8.1@146.8,87.95
  Bottom Layer w0.635: U1.24 95.732,55.268 97,54 118.5,54 v1(128,63.5)
PA0: R15.2 S5.1 U1.36 | length 89.7
  Bottom Layer w0.635: R15.2 15.625,46.625 15.625,50.375 15.5,50.5 15.5,63.5 25.5,63.5 27.75,65.75 27.75,69.25 31,72.5 42,72.5 49,65.5 49,56 52.237,52.763 52.763,52.763 53,53 62,53 65,56 65,57.884 U1.36
PA1: R7.2 S4.1 U1.35 | length 53
  Top Layer w0.635: S4.1@44.5,50.5 S4.1@44.5,63.5
  Bottom Layer w0.635: R7.2 44.541,66.531 44.541,63.541 44.5,63.5 44.5,56 49.5,51 62.5,51 67.683,56.183 67.683,58.027 U1.35
PA2: R5.2 S2.1 U1.34 | length 75.2
  Top Layer w0.635: S2.1@30.5,67.5 S2.1@30.5,80.5
  Bottom Layer w0.635: S2.1@30.5,67.5 30.5,67.131 31.75,65.881 R5.2 31.75,56.25 35,53 40.5,53 42,51.5 42,49 44,47 45,47 46.929,48.929 64.429,48.929 70.332,54.832 U1.34
PA3: R6.2 S3.1 U1.33 | length 74.3
  Bottom Layer w0.635: S3.1@25.5,34.5 S3.1@25.5,46.5 ; R6.2 25.5,47.5 S3.1@25.5,46.5 ; U1.33@72.64,58.136 U1.33 72.872,54.872 65.5,47.5 51,47.5 45.5,42 30,42 S3.1@25.5,46.5
PA4: R2.1 U1.32 | length 85.9
  Top Layer w0.635: R2.1 7.25,84.475 7.383,84.343 7.408,84.343 8.75,83 59.828,83 60.328,83.5 v1(60.5,83.5)
  Bottom Layer w0.635: v1(60.5,83.5) 61,83.5 75.412,69.088 U1.32
PA5: *.3 U1.31 | length 26.1
  Bottom Layer w0.635: *.3 72.69,74.81 78,69.5 78,58.184 U1.31
PA6: R16.2 S6.1 U1.30 | length 64.6
  Top Layer w0.635: S6.1@121.5,50.5 S6.1@121.5,63.5
  Bottom Layer w0.635: U1.30 88.128,50.5 111.5,50.5 116,46 119,46 121.5,48.5 ; S6.1@121.5,50.5 121.522,50.478 121.522,48.5 121.522,46.034 R16.2
PA7: *.4 U1.29 | length 27.1
  Bottom Layer w0.635: *.4 75.23,75.77 83.032,67.968 U1.29
PA11: R10.1 U1.8 | length 53.9
  Bottom Layer w0.635: U1.8 85.572,36.428 102,20 102,11.5 98,7.5 94.405,7.5 89.887,12.018 R10.1
PA12: R8.1 U1.9 | length 47.6
  Bottom Layer w0.635: U1.9 83.032,36.468 100,19.5 100,12 97.5,9.5 94.905,9.5 92.387,12.018 R8.1
PA15: R11.1 U1.10 | length 41.1
  Bottom Layer w0.635: U1.10 80.492,37.008 98.5,19 98.5,13.5 97.018,12.018 R11.1
PB0: R17.2 S7.1 U1.28 | length 86.7
  Bottom Layer w0.635: U1.28 85.817,57.891 85.817,56.183 90,52 112.5,52 116.737,47.763 117.263,47.763 119,49.5 119,52 124.5,57.5 135.5,57.5 141.5,63.5 141.5,50.5 141.534,50.466 141.534,46.045 R17.2
PB1: *.5 R19.1 U1.27 | length 32.4
  Bottom Layer w0.635: R19.1 76.5,84.5 77.604,83.396 77.604,82.166 *.5 77.77,77.23 88.112,66.888 U1.27
PB3: R3.2 R9.2 R12.2 U1.11 | length 52.8
  Bottom Layer w0.635: R3.2 R9.2 R12.2 85.5,12 87,13.5 87,15.5 77.952,24.548 U1.11
PB4: R18.1 U1.12 | length 35.9
  Bottom Layer w0.635: R18.1@63.974,12 64.5,12 66.5,14 66.5,18 75.412,26.912 U1.12
PB5: R14.1 U1.13 | length 50.4
  Bottom Layer w0.635: R14.1 53.5,12 52,13.5 52,18 57,23 66,23 72.872,29.872 U1.13
PB6: R13.1 U1.14 | length 55.8
  Bottom Layer w0.635: R13.1 60.975,12 59.475,10.5 52.5,10.5 50,13 50,18.5 56.5,25 64.664,25 70.332,30.668 U1.14
PB7: J1.1 U1.15 | length 65.7
  Bottom Layer w0.635: U1.15 73.896,49 108.5,49 120.5,37 J1.1
PB10: *.6 U1.26 | length 28.1
  Bottom Layer w0.635: *.6 80.31,77.69 90.652,67.348 U1.26
PB11: *.7 U1.25 | length 28.1
  Bottom Layer w0.635: *.7 82.85,78.65 93.192,68.308 U1.25
PB12: J2.2 U1.1 | length 40.4
  Bottom Layer w0.635: U1.1 103.352,36.148 116.67,22.83 J2.2
PB13: J2.5 U1.2 | length 44.8
  Bottom Layer w0.635: U1.2 101,43.084 101,45 102,46 105,46 106,45 106,39 118.87,26.13 J2.5
PB14: J2.7 U1.3 | length 47.3
  Bottom Layer w0.635: U1.3 98.272,44.772 101,47.5 107,47.5 114.628,39.872 114.628,34.372 119.652,29.348 120.67,28.33 J2.7
PB15: J2.3 U1.4 | length 54
  Bottom Layer w0.635: U1.4 95.732,40.268 115.5,20.5 133.128,20.5 134,21.372 134,23 133.07,23.93 J2.3
PC13: JB.2 U1.39 | length 48.9
  Bottom Layer w0.635: JB.2 39.5,89 42.5,86 42.5,82.5 52,73 52,57 53.5,55.5 56.5,55.5 57.264,56.264 57.264,57.767 U1.39
POWER: D1.1 U3.4 | length 81.1
  Top Layer w0.635: D1.1 26,98 26.5,98.5 48,98.5 49,99.5 69,99.5 69.5,99 87,99 92,94 96.5,94 97.55,92.95 U3.4
VBAT: C3.2 C4.2 C7.2 JB.1 L1.2 R26.2 S1.2 U2.5 U3.5 | length 138.9
  Top Layer w0.635: S1.2@10.2,96.05 10.2,88.05 26.05,88.05 33.5,95.5 39.135,95.5 39.659,94.976 v1(45.5,94.976) ; v1(49.5,93.5) 49.563,93.437 51.756,93.437 U2.5 51.794,93.411 51.794,94.994 C4.2 C3.2 ; C7.2 U3.5
  Top Layer w1.27: v1(90,92) 91.5,92 C7.2
  Bottom Layer w0.635: v1(45.5,94.976) 46.976,93.5 47,93.5 ; R26.2 50.525,84.75 51.775,86 54.5,86
  Bottom Layer w1.27: JB.1 36.04,91.5 38,91.5 ; 46.976,93.5 40,93.5 38,91.5 ; 47,93.5 v1(49.5,93.5) ; v1(90,92) 83.5,92 80,88.5 73,88.5 70.5,86 54.5,86 49,91.5 38,91.5
pads on no net: *.8 J2.1 J2.8 J2.9 J2.10 J2.11 J2.12 J2.13 J2.CD1 J.2 J.3 U1.5 U1.6 U1.7 U1.16 U1.17 U1.37 U1.38 U2.6 U3.6
copper on no net: | length 499
  Top Layer w0.254: 1,1 151,1 151,101 2,101 2,1

## Polygon pours and split planes (outlines as drawn)
GND on Bottom Layer "GND_L02_P000" (solid, pour order 0): 64.5,90.5 64.5,101 87,101 87,90.5

## Other copper
Top Layer:
  region: 119.107,22.526 119.107,22.323 119.107,22.12 119.31,22.12 119.31,21.917 119.31,21.714 119.31,21.51 119.31,21.307 119.514,21.307 119.514,21.104 119.514,20.901 119.514,20.698 119.717,20.698 119.717,20.494 119.717,20.291 119.717,20.088 119.92,20.088 119.92,19.885 119.92,19.682 119.92,19.478 119.92,19.275 120.123,19.275 120.123,19.072 120.123,18.869 120.123,18.666 120.326,18.666 120.326,18.462 120.326,18.259 120.326,18.056 120.53,18.056 120.53,17.853 120.53,17.65 120.53,17.446 120.53,17.243 120.733,17.243 120.733,17.04 120.733,16.837 120.733,16.634 120.936,16.634 120.936,16.43 117.075,16.43 117.075,16.634 117.278,16.634 117.278,16.837 117.278,17.04 117.278,17.243 117.482,17.243 117.482,17.446 117.482,17.65 117.482,17.853 117.685,17.853 117.685,18.056 117.685,18.259 117.685,18.462 117.685,18.666 117.888,18.666 117.888,18.869 117.888,19.072 117.888,19.275 118.091,19.275 118.091,19.478 118.091,19.682 118.091,19.885 118.294,19.885 118.294,20.088 118.294,20.291 118.294,20.494 118.294,20.698 118.498,20.698 118.498,20.901 118.498,21.104 118.498,21.307 118.701,21.307 118.701,21.51 118.701,21.714 118.701,21.917 118.904,21.917 118.904,22.12 118.904,22.323 118.904,22.526 118.904,22.73 119.107,22.73 hole: 119.107,20.698 118.904,20.698 118.904,20.494 118.904,20.291 118.701,20.291 118.701,20.088 118.701,19.885 118.701,19.682 118.498,19.682 118.498,19.478 118.498,19.275 118.498,19.072 118.498,18.869 118.294,18.869 118.294,18.666 118.294,18.462 118.294,18.259 118.091,18.259 118.091,18.056 118.091,17.853 118.091,17.65 118.091,17.446 117.888,17.446 117.888,17.243 117.888,17.04 120.123,17.04 120.123,17.243 120.123,17.446 119.92,17.446 119.92,17.65 119.92,17.853 119.92,18.056 119.92,18.259 119.717,18.259 119.717,18.462 119.717,18.666 119.717,18.869 119.514,18.869 119.514,19.072 119.514,19.275 119.514,19.478 119.514,19.682 119.31,19.682 119.31,19.885 119.31,20.088 119.31,20.291 119.107,20.291 119.107,20.494
  region: 195 vertices and 1 holes, not listed, extent 112.402,12.57 125.61,25.371
  region: 266 vertices and 1 holes, not listed, extent 126.422,12.163 138.614,25.371
  text "RESET" at 132.254,91.254 h1.52
  text "POWER" at 12.254,90.254 h1.52
Bottom Layer:
  text "+" at 35.754,93.5 h1.52
  text "-" at 35.754,83.492 h1.52